# EAGLE board ellin (EAGLE 6.4)
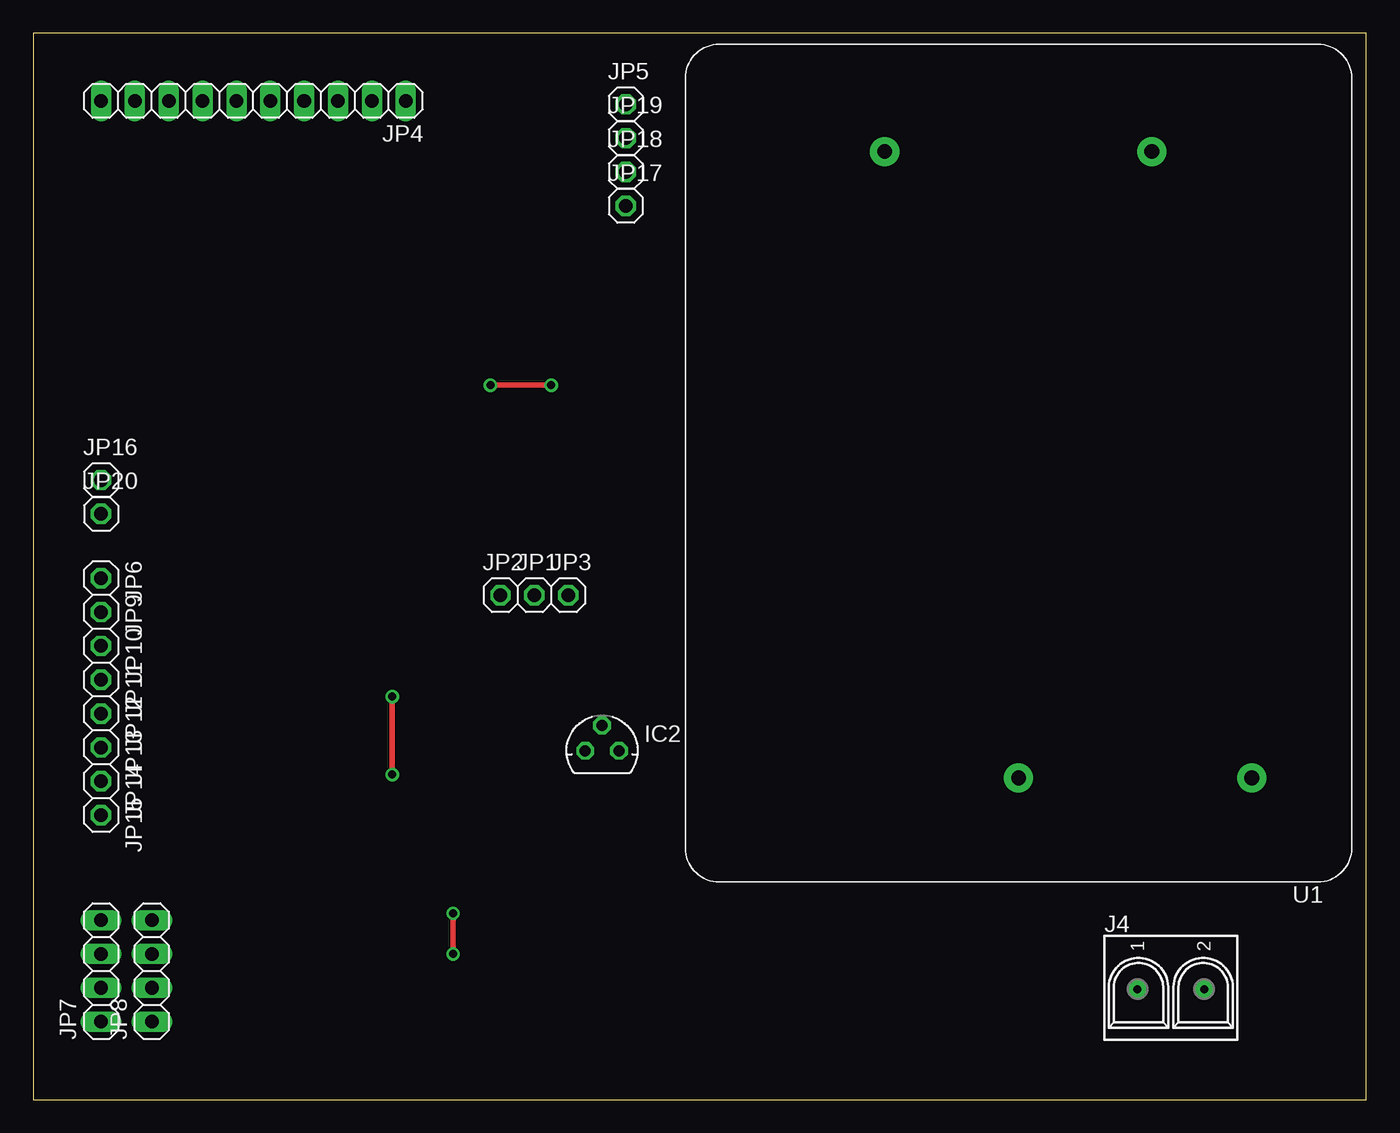
[diagram p0: board, top side]
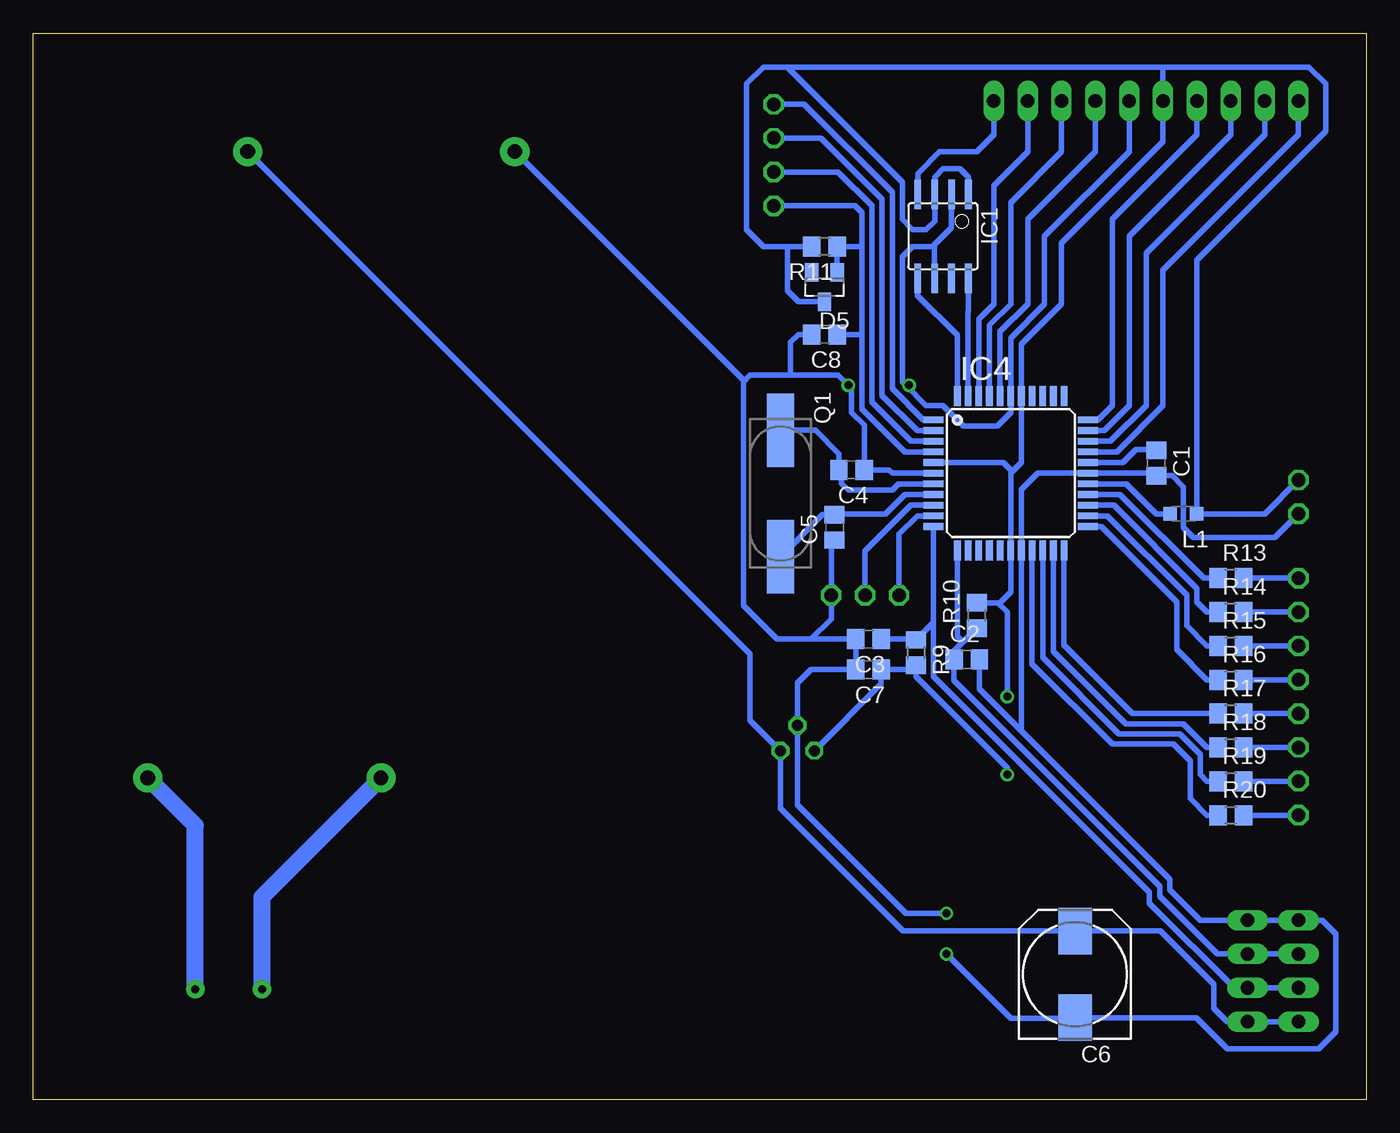
[diagram p1: board, bottom side, seen from below]

Size 100 x 80 mm. Coordinates in mm from the lower left corner, seen from the top.
Outline: 0,0 100,0 100,80 0,80 0,0
Copper layers (1*16): Top 0.035mm / dielectric 1.5mm / Bottom 0.035mm
Design rules "default *": minimum track width 10mil, minimum drill 24mil, track to track 8mil, track to pad 8mil, pad to pad 8mil, via to via 8mil, smd to smd 8mil, copper to edge 40mil, drill to drill 8mil, minimum pad ring 10mil, minimum via ring 8mil, stop-mask expansion 4mil, vias tented up to drill 0mil, thermal gap 10mil
Net classes: 1 power: width 0.8 mm, drill 0.6 mm, clearance 1 mm

## Footprints (pad centres in the part's own frame; a part is rotated, then mirrored left to right if it is on the bottom)
C0805 = smd 1.3 x 1.5: 1 -0.95,0; 2 0.95,0
140CLH-0810 = smd 3.5 x 2.5: + 3.25,0; - -3.25,0
SOT23 = smd 1 x 1.4: 1 -0.95,-1.1; 2 0.95,-1.1; 3 0,1.1
SOIC8 = smd 0.5 x 2.2: 1 -1.905,-3.154; 2 -0.645,-3.154; 3 0.625,-3.154; 4 1.895,-3.154; 5 1.905,3.154; 6 0.635,3.154; 7 -0.635,3.154; 8 -1.905,3.154
78LXX = drill 0.813 octagon: GND 0,1.905; IN 1.27,0; OUT -1.27,0
TQFP44 = smd 1.5 x 0.5: 1 -5.8,4; 2 -5.8,3.2; 3 -5.8,2.4; 4 -5.8,1.6; 5 -5.8,0.8; 6 -5.8,0; 7 -5.8,-0.8; 8 -5.8,-1.6; 9 -5.8,-2.4; 10 -5.8,-3.2; 11 -5.8,-4; 23 5.8,-4; 24 5.8,-3.2; 25 5.8,-2.4; 26 5.8,-1.6; 27 5.8,-0.8; 28 5.8,0; 29 5.8,0.8; 30 5.8,1.6; 31 5.8,2.4; 32 5.8,3.2; 33 5.8,4 | smd 0.5 x 1.5: 12 -4,-5.8; 13 -3.2,-5.8; 14 -2.4,-5.8; 15 -1.6,-5.8; 16 -0.8,-5.8; 17 0,-5.8; 18 0.8,-5.8; 19 1.6,-5.8; 20 2.4,-5.8; 21 3.2,-5.8; 22 4,-5.8; 34 4,5.8; 35 3.2,5.8; 36 2.4,5.8; 37 1.6,5.8; 38 0.8,5.8; 39 0,5.8; 40 -0.8,5.8; 41 -1.6,5.8; 42 -2.4,5.8; 43 -3.2,5.8; 44 -4,5.8
DG126-5.0 = drill 0.6 pad 1.4: 1 -2.5,-0.1; 2 2.5,-0.1
1X01 = drill 1.016 octagon: 1 0,0
1X10 = drill 1.016 long: 1 -11.43,0; 2 -8.89,0; 3 -6.35,0; 4 -3.81,0; 5 -1.27,0; 6 1.27,0; 7 3.81,0; 8 6.35,0; 9 8.89,0; 10 11.43,0
1X04 = drill 1.016 long: 1 -3.81,0; 2 -1.27,0; 3 1.27,0; 4 3.81,0
L2012C = smd 1 x 1: 1 -1,0; 2 1,0
CSM-7X-DU = smd 5.5 x 2: 1 -4.75,0; 2 4.75,0
R0805 = smd 1.3 x 1.5: 1 -0.95,0; 2 0.95,0
PM-05 = drill 1.1 pad 2.184: AC/L -17.5,23.625; AC/N 0,23.625; V+ -10,-23.375; V- 10.04,-23.375

## Placement (x,y rotation side)
C1  0.1uF  [C0805]  15.75,47.75 270 bottom
C2  22nF  [C0805]  29.97,33.02 0 bottom
C3  22nF  [C0805]  37.34,34.54 180 bottom
C4  22pF  [C0805]  38.61,47.24 180 bottom
C5  22pF  [C0805]  39.88,42.93 90 bottom
C6  10uF  [140CLH-0810]  21.84,9.4 90 bottom
C7  22nF  [C0805]  37.34,32.26 180 bottom
C8  0.1uF  [C0805]  40.64,57.4 180 bottom
D5  BAS16  [SOT23]  40.64,60.96 180 bottom
IC1  MCP4011  [SOIC8]  31.75,64.77 180 bottom
IC2  78L05  [78LXX]  42.67,26.16 0 top
IC4  MEGA16-A  [TQFP44]  26.67,46.99 0 bottom
J4  DG126-5.0  [DG126-5.0]  85.34,8.38 0 top
JP1  RXD  [1X01]  37.59,37.85 0 top
JP2  TXD  [1X01]  35.05,37.85 0 top
JP3  GND  [1X01]  40.13,37.85 0 top
JP4  LCD  [1X10]  16.51,74.93 180 top
JP5  [1X01]  44.45,74.68 0 top
JP6  [1X01]  5.08,39.12 270 top
JP7  [1X04]  5.08,9.65 90 top
JP8  [1X04]  8.89,9.65 90 top
JP9  [1X01]  5.08,36.58 270 top
JP10  [1X01]  5.08,34.04 270 top
JP11  [1X01]  5.08,31.5 270 top
JP12  [1X01]  5.08,28.96 270 top
JP13  [1X01]  5.08,26.42 270 top
JP14  [1X01]  5.08,23.88 270 top
JP15  [1X01]  5.08,21.34 270 top
JP16  [1X01]  5.08,46.48 0 top
JP17  [1X01]  44.45,67.06 0 top
JP18  [1X01]  44.45,69.6 0 top
JP19  [1X01]  44.45,72.14 0 top
JP20  [1X01]  5.08,43.94 0 top
L1  [L2012C]  13.72,43.94 180 bottom
Q1  20MHz  [CSM-7X-DU]  43.94,45.47 270 bottom
R9  10k  [R0805]  33.78,33.53 270 bottom
R10  10k  [R0805]  29.21,36.32 90 bottom
R11  10k  [R0805]  40.64,64.01 180 bottom
R13  100  [R0805]  10.16,39.12 0 bottom
R14  100  [R0805]  10.16,36.58 0 bottom
R15  100  [R0805]  10.16,34.04 0 bottom
R16  100  [R0805]  10.16,31.5 0 bottom
R17  100  [R0805]  10.16,28.96 0 bottom
R18  100  [R0805]  10.16,26.42 0 bottom
R19  100  [R0805]  10.16,23.88 0 bottom
R20  100  [R0805]  10.16,21.34 0 bottom
U1  PM-05  [PM-05]  73.91,47.75 180 top

## Library data of the parts
C1-C8 L1 R9-R11 R13-R20 = rcl
D5 IC1 J4 U1 = ElLin
IC2 = v-reg
IC4 = atmel; MPN: ATMEGA16-16AU; OC_FARNELL: 9171134; OC_NEWARK: 96K6515
JP1-JP20 = pinhead
Q1 = crystal; OC_FARNELL: unknown; OC_NEWARK: unknown

## Nets
+12V: C6.+ IC2.IN JP7.1 JP8.1 U1.V+
AREF: C1.1 IC4.29
AVCC: IC4.27 L1.2
CH1: IC4.37
CH2: IC4.36
CH3: IC4.35
CH4: IC4.34
DATA4: IC4.23 R16.1
DATA5: IC4.24 R15.1
DATA6: IC4.25 R14.1
DATA7: IC4.26 R13.1
DB4: IC4.33 JP4.7
DB5: IC4.32 JP4.8
DB6: IC4.31 JP4.9
DB7: IC4.30 JP4.10
DIG_POT: IC1.8 IC4.43
EN: IC4.40 JP4.4
GND: C1.2 C2.2 C3.2 C4.1 C5.1 C6.- C7.2 C8.2 IC1.2 IC1.6 IC2.GND IC4.6 IC4.18 IC4.28 IC4.39 JP3.1 JP4.5 JP7.4 JP8.4 JP20.1 U1.V-
KEYB0: IC4.19 R20.1
KEYB1: IC4.20 R19.1
KEYB2: IC4.21 R18.1
KEYB3: IC4.22 R17.1
MISO: IC4.2 JP19.1
MOSI: IC4.1 JP5.1
N$9: JP6.1 R13.2
N$15 [power]: J4.1 U1.AC/N
N$16 [power]: J4.2 U1.AC/L
N$17: JP9.1 R14.2
N$18: JP10.1 R15.2
N$20: JP11.1 R16.2
N$21: JP12.1 R17.2
N$22: JP13.1 R18.2
N$23: JP14.1 R19.2
N$24: JP15.1 R20.2
PHASE_A: C3.1 IC4.11 JP7.2 JP8.2 R9.1
PHASE_B: C2.1 IC4.12 JP7.3 JP8.3 R10.1
POT_CS: IC1.5 IC4.44
R/!W!: IC4.41 JP4.3
RS: IC4.42 JP4.2
RST: C8.1 D5.1 IC4.4 JP17.1 R11.1
RXD: IC4.9 JP1.1
SCK: IC4.3 JP18.1
TXD: IC4.10 JP2.1
VCC: C7.1 D5.3 IC1.1 IC1.3 IC2.OUT IC4.5 IC4.17 IC4.38 JP4.6 JP16.1 L1.1 R9.2 R10.2 R11.2
W: IC1.4 JP4.1
XTAL1: C5.2 IC4.8 Q1.2
XTAL2: C4.2 IC4.7 Q1.1

## Tracks (layer width: path | path; a pad name or v marks a point on that pad's centre or on a via)
+12V
  Bottom 0.406: JP7.1 JP8.1 10.41,5.84 11.43,6.86 11.43,8.64 15.44,12.65 C6.+ 34.75,12.65 43.94,21.84 IC2.IN 46.23,28.45 46.23,33.44 U1.V+
AREF
  Bottom 0.406: IC4.29 18.25,47.79 17.27,48.77 15.81,48.77 C1.1
AVCC
  Bottom 0.406: IC4.27 18,46.19 15.75,43.94 L1.2
DATA4
  Bottom 0.406: IC4.23 19.88,42.99 14.22,37.34 14.22,33.78 11.94,31.5 R16.1
DATA5
  Bottom 0.406: IC4.24 19.41,43.79 13.46,37.85 13.46,35.56 11.94,34.04 R15.1
DATA6
  Bottom 0.406: IC4.25 18.94,44.59 12.7,38.35 12.7,37.34 11.94,36.58 R14.1
DATA7
  Bottom 0.406: IC4.26 18.47,45.39 12.19,39.12 R13.1
DB4
  Bottom 0.406: IC4.33 20.13,50.99 19.05,52.07 19.05,66.04 12.7,72.39 JP4.7
DB5
  Bottom 0.406: IC4.32 19.66,50.19 17.78,52.07 17.78,64.77 10.16,72.39 JP4.8
DB6
  Bottom 0.406: IC4.31 19.19,49.39 16.51,52.07 16.51,63.5 7.62,72.39 JP4.9
DB7
  Bottom 0.406: IC4.30 18.72,48.59 15.24,52.07 15.24,62.23 5.08,72.39 JP4.10
DIG_POT
  Bottom 0.406: IC4.43 29.87,59.08 29.84,59.1 IC1.8
EN
  Bottom 0.406: IC4.40 27.47,57.62 25.4,59.69 25.4,66.04 20.32,71.12 JP4.4
GND  (via drill 0.6)
  Top 0.406: v34.29,53.59 v38.86,53.59 | v31.5,10.92 v31.5,13.97
  Bottom 0.406: IC1.2 31.11,65.42 32.38,64.14 | 32.38,64.14 IC1.6 | 43.18,54.36 39.62,54.36 v38.86,53.59 38.61,53.34 38.61,51.56 37.66,50.61 C4.1 35.81,47.24 35.56,46.99 IC4.6 | 43.18,54.36 43.18,56.83 42.61,57.4 C8.2 | 32.38,64.14 32.51,64.01 34.04,64.01 34.8,63.25 34.8,53.85 34.54,53.59 | 46.74,53.85 46.74,37.08 44.2,34.54 41.66,34.54 | 41.66,34.54 40.13,36.07 JP3.1 40.13,41.72 C5.1 | 25.87,27.65 IC4.18 25.87,45.76 24.64,46.99 IC4.28 15.94,46.99 C1.2 14.54,46.8 13.72,45.97 13.72,42.93 12.95,42.16 6.86,42.16 JP20.1 | 41.66,34.54 C3.2 C7.2 41.66,32.26 42.67,31.24 IC2.GND 42.67,22.1 34.54,13.97 v31.5,13.97 | 25.87,27.65 14.73,16.51 14.73,15.75 12.45,13.46 JP8.4 JP7.4 3.3,13.46 2.29,12.45 2.29,5.08 3.56,3.81 10.41,3.81 12.75,6.15 C6.- 21.9,6.1 26.67,6.1 v31.5,10.92 | JP4.5 17.78,71.12 24.13,64.77 24.13,59.69 26.67,57.15 IC4.39 26.67,51.56 27.69,50.55 30.23,50.55 31.75,52.07 33.02,52.07 34.54,53.59 | 34.54,53.59 v34.29,53.59 | 46.74,53.85 46.23,54.36 43.18,54.36 | 46.74,53.85 46.74,53.99 U1.V- 63.88,71.12 | 25.87,27.65 29.02,30.8 C2.2
KEYB0
  Bottom 0.406: IC4.19 25.07,32.69 19.05,26.67 14.48,26.67 13.21,25.4 13.21,22.61 11.94,21.34 R20.1
KEYB1
  Bottom 0.406: IC4.20 24.27,33.16 18.54,27.43 13.97,27.43 12.45,25.91 12.45,24.38 11.94,23.88 R19.1
KEYB2
  Bottom 0.406: IC4.21 23.47,33.63 18.03,28.19 13.72,28.19 11.94,26.42 R18.1
KEYB3
  Bottom 0.406: IC4.22 22.67,34.1 17.53,28.96 R17.1
MISO
  Bottom 0.406: IC4.2 33.68,50.19 36.32,52.83 36.32,67.56 40.89,72.14 JP19.1
MOSI
  Bottom 0.406: IC4.1 33.21,50.99 35.56,53.34 35.56,68.07 42.16,74.68 JP5.1
N$9
  Bottom 0.406: R13.2 JP6.1
N$15
  Bottom 1.27: J4.1 82.84,15.2 U1.AC/N
N$16
  Bottom 1.27: J4.2 87.84,20.56 U1.AC/L
N$17
  Bottom 0.406: R14.2 JP9.1
N$18
  Bottom 0.406: R15.2 JP10.1
N$20
  Bottom 0.406: R16.2 JP11.1
N$21
  Bottom 0.406: R17.2 JP12.1
N$22
  Bottom 0.406: R18.2 JP13.1
N$23
  Bottom 0.406: R19.2 JP14.1
N$24
  Bottom 0.406: R20.2 JP15.1
PHASE_A
  Bottom 0.406: IC4.11 32.47,35.79 | 32.47,35.79 32.47,31.75 16.26,15.54 16.26,14.73 9.91,8.38 JP8.2 JP7.2 | C3.1 33.85,34.54 R9.1 32.47,35.79
PHASE_B
  Bottom 0.406: JP7.3 JP8.3 11.18,10.92 15.49,15.24 15.49,16 30.92,31.43 C2.1 30.92,33.66 30.26,34.32 | R10.1 30.26,34.32 | IC4.12 30.67,34.73 30.26,34.32
POT_CS
  Bottom 0.406: IC4.44 30.67,57.34 33.66,60.33 IC1.5
R/!W!
  Bottom 0.406: IC4.41 28.27,58.09 26.67,59.69 26.67,67.31 22.86,71.12 JP4.3
RS
  Bottom 0.406: IC4.42 29.07,58.56 27.94,59.69 27.94,68.58 25.4,71.12 JP4.2
RST
  Bottom 0.406: IC4.4 34.62,48.59 37.85,51.82 37.85,57.4 | 37.85,57.4 37.85,64.01 | 37.85,64.01 37.85,66.55 38.35,67.06 JP17.1 | 37.85,64.01 R11.1 D5.1 | C8.1 37.85,57.4
RXD
  Bottom 0.406: IC4.9 34.15,44.59 37.59,41.15 JP1.1
SCK
  Bottom 0.406: IC4.3 34.15,49.39 37.08,52.32 37.08,67.06 39.62,69.6 JP18.1
TXD
  Bottom 0.406: IC4.10 33.68,43.79 35.05,42.42 JP2.1
VCC  (via drill 0.6)
  Top 0.406: v26.92,30.23 v26.92,24.38
  Bottom 0.406: IC1.1 29.84,69.22 30.48,69.85 31.75,69.85 32.38,69.22 IC1.3 32.38,65.92 33.02,65.28 34.04,65.28 34.8,66.04 34.8,68.83 43.43,77.47 | 26.54,47.12 25.87,47.79 IC4.38 25.87,56.68 22.86,59.69 22.86,64.26 15.24,71.88 JP4.6 15.24,77.47 | 26.54,47.12 26.67,46.99 IC4.17 26.67,38.1 27.5,37.27 27.62,37.27 | R11.2 43.43,64.01 | 43.43,77.47 45.21,77.47 46.48,76.2 46.48,65.28 45.21,64.01 43.43,64.01 | IC4.5 27.22,47.79 26.54,47.12 | D5.3 42.59,59.86 43.43,60.71 43.43,64.01 | 43.43,77.47 15.24,77.47 | 15.24,77.47 4.32,77.47 3.05,76.2 3.05,72.64 12.72,62.98 L1.1 7.62,43.94 JP16.1 | IC2.OUT 36.39,31.18 C7.1 34.1,32.26 R9.2 33.78,31.75 26.92,24.89 v26.92,24.38 | R10.2 27.62,37.27 | 27.62,37.27 26.92,36.58 v26.92,30.23
W
  Bottom 0.406: IC1.4 33.65,69.48 32,71.12 29.21,71.12 27.94,72.39 JP4.1
XTAL1
  Bottom 0.406: IC4.8 34.62,45.39 36.07,43.94 39.81,43.94 C5.2 40.78,43.88 Q1.2
XTAL2
  Bottom 0.406: IC4.7 35.09,46.19 35.56,45.72 38.86,45.72 39.37,46.23 39.37,47.06 C4.2 39.56,48.45 41.33,50.22 Q1.1